# Altium PCB FMC_ADC_100M_10B_16CHA_TDC_PSU.PcbDoc (part 2 of 2)
Units mil, origin at the board's own origin, x right, y up, seen from the top; angles counter-clockwise.
Board outline 748.03 x 2716.54 mil, 6 copper layers (TOP, G1, L2, L3, P4, BOTTOM), stack 50.472 mil thick; 83 components, 50 nets, 259 pads, 166 vias.
Unrouted connection lines stored in the file: 1.
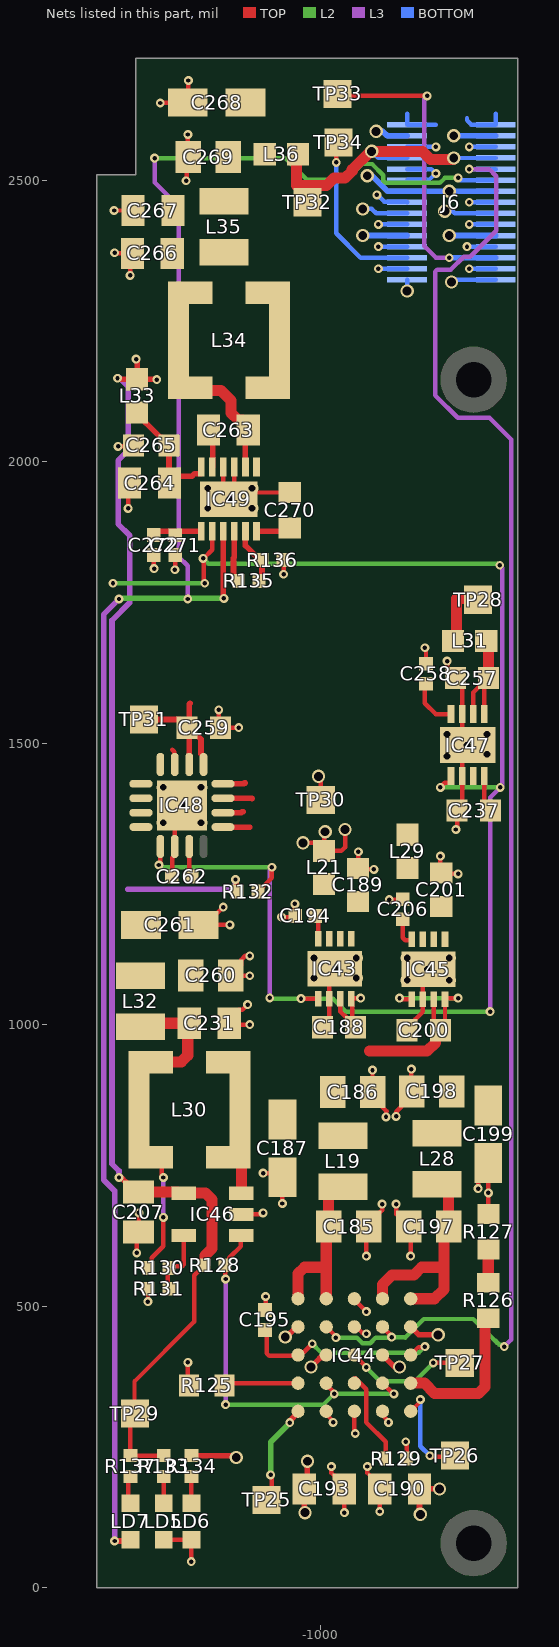
[diagram p6: the nets of this part, all layers, seen from the top]

## Via types
v1: diameter 15.75, hole 7.87, TOP to BOTTOM, tented both sides, 116 vias
v2: diameter 23.62, hole 15.75, TOP to BOTTOM, tented both sides, 25 vias
v3: diameter 23.62, hole 11.81, TOP to BOTTOM, tented both sides, 25 vias

## Nets (pads, with @x,y where several pads share a name; then routed paths per layer and width w, separated by ;. In a path a pad name is that pad's centre, name@x,y a point inside that pad or via, vN(x,y) a via of type N, cw(c..) or ccw(c..) an arc to the next point about the centre after c; other vN are vias at no path point)
GND: C185.1 C186.1 C187.2 C188.1 C189.1 C190.1 C193.1 C194.1 C195.1 C197.1 C198.1 C199.2 C200.1 C201.1 C206.1 C207.1 C231.1 C237.1 C257.1 C258.1 C259.1 C260.1 C261.2 C262.1 C264.1 C265.1 C266.1 C267.1 C268.1 C269.1 C270.1 C271.1 C272.1 IC43.6 IC43.9 IC44.B5 IC44.C1 IC44.C2 IC44.C5 IC44.D5 IC45.6 IC45.9 IC46.2 IC47.3 IC47.6 IC47.9 IC48.6 IC48.17 IC49.9 IC49.10 IC49.13 J6.5 J6.6 J6.10 J6.12 J6.15 J6.16 J6.19 J6.20 J6.23 J6.24 J6.27 J6.28 LD5.1 LD6.1 R125.2 R127.2 R129.1 R131.1 R136.2 | length 3669
  TOP w7.87: v1(-1367,2446) C267.1@-1333.43,2446 ; v1(-1366,2371) -1365,2370 C266.1@-1334.43,2370 -1338.58,2365.85 v1(-1338.58,2330.71) ; v1(-1360,2027) -1334.29,2027 C265.1@-1332.55,2028.74 ; v1(-1342,1917) -1342,1959.23 C264.1@-1339.49,1961.74 ; v1(-1326.77,594.49) -1326.77,628.8 C207.1@-1324,631.57 -1322.83,632.73 v1(-1322.83,665.35) ; v1(-1307.09,507.87) -1306.75,508.21 -1306.75,530.4 R131.1@-1306.41,530.74 ; C272.1@-1296.42,1834.1 -1296.42,1810.42 v1(-1296,1810) ; v1(-1285,2637) -1284.38,2637.62 -1235.56,2637.62 -1235,2638.18 v1(-1235,2677) ; LD5.1@-1283,83 -1281.1,84.9 LD5.1@-1278.88,84.9 LD6.1@-1229.67,84.9 -1229.67,46.33 v1(-1230,46) ; C262.1@-1263.78,1267.72 -1263.78,1296.45 -1259.24,1300.99 IC48.6@-1259.24,1316.37 -1259.24,1353.73 IC48.17@-1259.84,1354.33 ; v1(-1259,1808) -1258.42,1808.58 C271.1@-1258.42,1833.91 ; v1(-1239,2499) -1238.31,2499.69 -1238.31,2538.12 C269.1@-1235.43,2541 -1236,2541.57 v1(-1236,2581) ; v1(-1236,400) -1236,361 R125.2@-1234,359 ; v1(-1181.1,1559.06) -1181.1,1530.17 C259.1@-1178.3,1527.37 -1178.11,1527.56 v1(-1145.67,1527.56) ; v1(-1173.23,1208.66) -1184.22,1197.67 -1196.15,1197.67 C261.2@-1216.82,1177 -1161.58,1177 v1(-1161.42,1177.17) ; IC49.10@-1173.08,1990.46 -1173.08,1956.54 IC49.13@-1169.29,1952.76 ; IC49.9@-1153.39,1990.46 -1153.39,1952.6 IC49.13@-1149.61,1948.82 ; IC49.13@-1150,1945 -1149.82,1945.18 C270.1@-1054.97,1945.18 ; IC46.2@-1140.9,662.75 -1107.1,662.75 -1104.49,665.35 v1(-1102.36,665.35) ; v1(-1129.92,1035.43) -1139.39,1025.97 -1145.67,1025.97 -1162.4,1009.24 C231.1@-1162.4,1002.35 -1160.05,1000 v1(-1125.98,1000) ; v1(-1125.98,1086.61) -1159.1,1086.61 C260.1@-1159.83,1087.35 -1141.13,1106.05 -1141.13,1114.77 -1133.86,1122.05 v1(-1125.98,1122.05) ; v1(-1102.36,736.22) -1075.4,736.22 C187.2@-1068,728.82 v1(-1068,682.16) v1@-1070.87,679.3 ; C195.1@-1099,493 -1098,494 v1(-1098,517) ; v1(-1069.43,1190.76) -1047.43,1190.76 C194.1@-1045.28,1192.91 -1045.8,1193.44 v1(-1045.8,1214.39) ; R136.2@-1067.17,1825.1 -1066,1823.93 v1(-1066,1800) ; C188.1@-992,1003 -984.84,1010.16 IC43.6@-984.84,1046.21 -984.84,1091.16 IC43.9@-983,1093 ; IC44.D5@-990.21,313 -987.2,309.99 -987.2,304.64 -978.01,295.45 v1(-978.01,293.31) ; v1(-981,215) -981,203.44 -976.39,198.83 -975.06,198.83 -958.32,182.09 C193.1@-958.32,175.2 -958.32,133.32 v1(-958,133) ; IC44.C5@-940.21,313 -940.21,277.34 -938.64,275.76 v1(-938.64,273.63) ; IC44.C2@-940.21,463 -936.61,463 -925.92,452.3 -920.46,452.3 v1(-918.95,450.8) ; IC44.C1@-940.21,513 -940.21,511.43 v1(-918.95,490.17) ; v1(-933.07,1307.09) -933.07,1278.46 C189.1@-934,1277.53 -932.06,1275.59 v1(-905.51,1275.59) ; v1(-918.95,588.59) -918.95,637.05 C185.1@-914.97,641.04 -914.97,646.94 -896.27,665.65 -895.61,665.65 -891,670.26 v1(-891,681) ; v1(-917,215) -917,203.44 -912.39,198.83 -912.06,198.83 -895.33,182.09 C190.1@-895.33,175.2 -895,174.87 v1(-895,135) ; C186.1@-907.97,879.97 v1(-908,919) ; C186.1@-907.97,879.97 -896.92,868.92 -896.92,859.92 -883,846 -884,845 v1(-884,836) ; IC44.B5@-890.21,313 -887.2,309.99 -887.2,303.06 -879.58,295.45 v1(-879.58,293.31) ; v1(-878.28,1222.07) -854.7,1222.07 C206.1@-854.33,1222.44 ; v1(-866.14,681.1) -866.14,663.35 C197.1@-843.83,641.04 -840.21,637.42 v1(-840.22,588.59) ; v1(-866,837) -866,843 -865,844 -866,845 -857.1,853.9 -857.1,862.5 C198.1@-838.4,881.2 -839,881.8 v1(-839,921) ; v1(-849,259) -847.5,257.5 R129.1@-847.5,229 ; C200.1@-837,1004 -833.51,1004 -831.76,1005.75 -831.76,1009.24 -818.59,1022.41 IC45.6@-818.59,1044.79 -818.59,1088.59 IC45.9@-820,1090 ; v1(-814.96,1669.29) -814.96,1667.16 -813,1665.2 C258.1@-813,1640.72 ; v1(-787.4,1299.21) -787.4,1270.46 C201.1@-786,1269.06 -784.66,1267.71 v1(-755.9,1267.71) ; v1(-775.59,1645.67) -775.59,1630.19 C257.1@-760.85,1615.45 ; v1(-759.84,1346.46) -757.53,1348.77 C237.1@-757.53,1380 ; C237.1@-758,1387 -757.42,1387 -748.67,1395.75 IC47.6@-748.67,1441.25 -748.67,1477.02 -751.97,1480.31 -751.97,1483.11 IC47.9@-738.83,1496.25 ; C257.1@-755.91,1610.24 -748.67,1603 IC47.3@-748.67,1551.25 -748.67,1522.98 IC47.9@-751.97,1519.68 ; v1(-720.47,708.66) -720.47,763.43 -716.19,767.72 C199.2@-702.42,753.94 ; C199.2@-717,755 -702.42,740.42 v1@-702.42,701 ; R127.2@-702.42,671.27 v1@-702.42,701 ; v1(-702,701) v1@-702.42,701
  BOTTOM w7.87: v1(-900.12,2473.89) -899.1,2473.89 -897.64,2472.44 -886.8,2461.6 -847.43,2461.6 J6.16@-846.46,2460.63 ; v1(-897.64,2342.52) J6.28@-846.46,2342.52 ; v1(-897.64,2381.89) J6.24@-846.46,2381.89 ; v1(-897.64,2421.26) J6.20@-846.46,2421.26 ; J6.12@-846.46,2500 -845.47,2500.98 -806.77,2500.98 -795.94,2511.81 -803.82,2519.69 J6.10@-846.46,2519.69 ; J6.6@-846.46,2559.06 v1(-795.28,2559.06) ; v1(-740.16,2381.89) J6.23@-688.98,2381.89 ; v1(-736.22,2342.52) J6.27@-688.98,2342.52 ; v1(-736.22,2421.26) J6.19@-688.98,2421.26 ; v1(-736.22,2460.63) J6.15@-688.98,2460.63 ; v1(-736.22,2559.06) J6.5@-688.98,2559.06
  other v1: -795.27,2511.81
  other v3: -846.46,1078.74 -771.65,1078.74 -1011.81,1082.68 -937.01,1082.68 -972.44,1098.43 -811.02,1098.43 -1011.81,1118.11 -937.01,1118.11 -846.46,1118.11 -771.65,1118.11 -1279.53,1358.27 -1212.6,1358.27 -1244.09,1389.76 -1279.53,1421.26 -1212.6,1421.26 -775.59,1476.38 -704.72,1480.31 -740.16,1496.06 -775.59,1515.75 -704.72,1515.75 -1200.79,1917.32 -1122.05,1917.32 -1161.42,1933.07 -1200.79,1952.76 -1122.05,1952.76
N3V0: C266.2 C267.2 IC49.7 L34.2 L35.1
N3V0A: J6.7 J6.8 L36.2 TP32.1 | length 511.8
  TOP w19.68: L36.2@-1040.47,2546 -1043.31,2543.17 -1043.31,2490.31 -990.01,2490.31 -976.38,2503.94 -956.69,2503.94 -943.98,2516.65 -943.98,2518.91 -911.71,2551.18 v2(-909.45,2551.18) -819.52,2551.18 -804.68,2536.34 v2@-763.78,2536.34
  BOTTOM w7.87: v2(-909.45,2551.18) -897.64,2539.37 J6.8@-846.46,2539.37 ; v2(-763.78,2539.37) J6.7@-688.98,2539.37
NetC194_2: C194.2 IC43.4 | length 47.9
  TOP w7.87: C194.2@-1011.81,1196.85 -1010.64,1196.85 -1004.52,1190.73 IC43.4@-1004.52,1152.64
NetC195_2: C195.2 IC44.A3 IC44.E3 | length 370.4
  TOP w7.87: C195.2@-1096.12,450.8 -1096.12,416.04 -1091.51,411.43 -1041.79,411.43 IC44.E3@-1040.21,413 ; IC44.E3@-1042,418 -1040.01,416.01 -1032.94,416.01 -1030.95,418 -1030,418 v1(-1015,433) ; IC44.A3@-840.21,413 -826.15,427.06 -815.94,427.06 v1(-815,428)
  L2 w7.87: v1(-1015,433) -999.32,417.32 -825.68,417.32 v1(-815,428)
NetC206_2: C206.2 IC45.4 | length 51.4
  TOP w7.87: C206.2@-854.33,1187.01 -854.33,1154.22 -849.72,1149.61 -839.88,1149.61 IC45.4@-838.28,1151.21
NetC258_2: C258.2 IC47.4 | length 82.3
  TOP w7.87: C258.2@-814.96,1598.43 -814.96,1570.87 -795.35,1551.25 IC47.4@-768.35,1551.25
NetC262_2: C262.2 IC48.7 | length 51.9
  TOP w7.87: IC48.7@-1233.65,1316.37 -1233.65,1271.27 -1230.1,1267.72 C262.2@-1228.35,1267.72
NetC263_1: C263.1 IC49.11 | length 63.9
  TOP w10: IC49.11@-1192.76,1990.46 -1192,1991.22 C263.1@-1192,2054
NetC263_2: C263.2 IC49.8 L34.1 | length 218
  TOP w10: C263.2@-1134,2051 -1133.71,2050.71 IC49.8@-1133.71,1990.46
  TOP w19.68: L34.1@-1240.16,2125.98 -1177.17,2125.98 -1159.5,2108.31 -1159.5,2086.61 -1146.34,2073.46 -1139.45,2073.46 -1128.62,2062.63 C263.2@-1128.62,2055.74
NetC264_2: C264.2 C265.2 IC49.12 L33.1 | length 208.6
  TOP w10: L33.1@-1326.06,2087.21 -1311.37,2072.53 -1311.37,2069.37 -1285.43,2043.43 -1283.26,2043.43 -1272,2032.17 C265.2@-1272,2028 ; C265.2@-1269.56,2028.74 -1269.56,1970.56 C264.2@-1269,1970 ; C264.2@-1266,1974 -1228.9,1974 -1224.18,1978.72 -1213.35,1978.72 -1212.45,1979.63 IC49.12@-1212.45,1990.46
NetC268_2: C268.2 C269.2 L35.2 L36.1
NetC270_2: C270.2 IC49.6 | length 55.6
  TOP w10: IC49.6@-1114.02,1876.28 -1060.28,1876.28 C270.2@-1059,1875
NetC271_2: C271.2 C272.2 IC49.1 | length 82.8
  TOP w10: C272.2@-1291,1871 -1291,1874.49 -1289.21,1876.28 -1258.42,1876.28 IC49.1@-1212.45,1876.28
NetIC44_A4: IC44.A4 R126.1 | length 267.4
  TOP w19.68: IC44.A4@-840.21,363 -816,363 -798,345 -719.53,345 -708,356.53 -708,470.48 -705.48,473 R126.1@-700,473
NetIC44_A5: IC44.A5 TP26.1 | length 181
  TOP w7.87: IC44.A5@-840.21,313 -824.51,328.71 -824.51,332.49 v1(-823,334) ; v1(-806,234) -804.49,232.49 -798.93,232.49 -798.43,232 TP26.1@-761,232
  BOTTOM w7.87: v1(-823,334) -823,251 v1(-806,234)
NetIC44_C3: IC44.C3 TP27.1 | length 217
  TOP w7.87: IC44.C3@-940.21,413 -921.18,393.97 v1@-921.03,393.97 ; v1(-800,399) TP27.1@-753,399
  L2 w7.87: v1(-919,391) -894.14,366.14 -832.86,366.14 v1(-800,399)
NetIC44_C4: IC44.C4 R129.2 | length 165.5
  TOP w7.87: IC44.C4@-938.64,372.06 -918.95,352.37 -918.95,293.31 -884.5,258.87 R129.2@-884.5,229
NetIC44_E4: IC44.E4 R125.1 | length 144.9
  TOP w7.87: R125.1@-1168.95,363 IC44.E4@-1040.21,363 ; R125.1@-1167.28,357.63 -1167.28,359.58 R125.1@-1157.23,369.63
NetIC44_E5: IC44.E5 TP25.1 | length 176.9
  TOP w7.87: TP25.1@-1096.12,155.52 -1087,164.64 -1087,195.87 -1087.49,196.36 -1087.49,197.51 v1@-1087,198
  TOP w10: v1@-1055,296 -1040.21,310.79 IC44.E5@-1040.21,313
  L2 w10: v1(-1089,200) -1089,258 -1055,292 v1(-1055,293)
NetIC46_3: IC46.3 L30.1 | length 75.1
  TOP w19.68: L30.1@-1149.61,771.65 -1140.9,762.95 IC46.3@-1140.9,700.15
NetIC46_5: IC46.5 R130.1 R131.2 | length 114.4
  TOP w7.87: R131.2@-1271.65,531.5 -1271.65,565.49 R130.1@-1269.4,567.74 ; R130.1@-1267.72,570.87 -1246.17,570.87 -1243.27,573.77 IC46.5@-1243.27,625.35
NetIC49_4: IC49.4 R135.1 | length 91
  TOP w10: IC49.4@-1153.39,1876.28 -1153.39,1829.99 -1155,1828.38 -1155,1797.28 -1150,1792.28 R135.1@-1150,1788
NetIC49_5: IC49.5 R135.2 R136.1 | length 102.5
  TOP w10: IC49.5@-1133.71,1876.28 -1133.71,1850.71 -1115.31,1832.31 -1110.6,1832.31 -1109,1830.71 R136.1@-1109,1826 ; R135.2@-1107,1787 -1104.18,1789.82 R136.1@-1104.18,1825.1
NetJ6_25: J6.25 TP33.1 | length 564.7
  TOP w7.87: TP33.1@-970,2653 -966.61,2649.61 v1(-811.02,2649.61)
  L3 w7.87: v1(-811.02,2649.61) -816.02,2644.61 -816.02,2382.95 -795.28,2362.2 v1(-771.65,2362.2)
  BOTTOM w10: v1(-771.65,2362.2) J6.25@-688.98,2362.2
NetJ6_26: J6.26 TP34.1 | length 307
  TOP w7.87: v1(-972.44,2531.5) -972.44,2562.99 TP34.1@-968.5,2566.93
  BOTTOM w7.87: v1(-972.44,2531.5) -972.44,2405.51 -929.13,2362.2 J6.26@-846.46,2362.2
NetLD5_2: LD5.2 R133.1 | length 45.2
  TOP w7.87: R133.1@-1279,195 -1278.88,194.88 LD5.2@-1278.88,149.86
NetLD6_2: LD6.2 R134.1 | length 43.4
  TOP w7.87: LD6.2@-1230,154 -1229.67,154.33 R134.1@-1229.67,197.3
NetLD7_2: LD7.2 R137.1 | length 47.8
  TOP w7.87: R137.1@-1342,196 -1342,153.92 LD7.2@-1337.94,149.86
NetR126_2: R126.2 R127.1 | length 66.9
  TOP w19.68: R127.1@-702.42,608.28 -702.42,543.42 R126.2@-701,542
P1V8: C259.2 IC48.9 IC48.10 IC48.11 IC48.12 IC48.13 IC48.14 J6.17 J6.18 TP31.1 | length 603.7
  TOP w10: TP31.1@-1314,1542 -1251.06,1542 -1244.09,1535.04 C259.2@-1244.09,1531.5 ; IC48.14@-1233.65,1462.04 -1233.65,1569.5 -1232.28,1570.87 ; C259.2@-1224.41,1519.68 -1224.41,1513.44 -1223.66,1512.69 -1218.46,1512.69 -1212.6,1506.83 -1212.6,1481.38 -1208.06,1476.84 IC48.13@-1208.06,1462.04 ; IC48.9@-1173.61,1350.82 -1126.41,1350.82 -1125.98,1350.39 ; IC48.10@-1173.61,1376.41 -1140.89,1376.41 -1139.35,1377.95 -1137.8,1377.95 ; IC48.11@-1173.61,1402 -1122.47,1402 -1122.05,1401.57 ; IC48.12@-1173.61,1427.59 -1136.96,1427.59 -1135.41,1429.13 -1133.86,1429.13
  BOTTOM w7.87: v2(-925.2,2448.82) -909.45,2448.82 -901.57,2440.94 J6.18@-846.46,2440.94 ; v2(-779.53,2444.88) -765.59,2444.88 -761.65,2440.94 J6.17@-688.98,2440.94
P2V0: C260.2 C261.1 IC48.1 IC48.2 IC48.3 IC48.4 IC48.15 IC48.16 L32.2 | length 28
  TOP w7.87: -1263.78,1488.19 -1260.37,1484.78 -1260.37,1463.17 IC48.15@-1259.24,1462.04
P2V0_N: C231.2 L30.2 L32.1 R130.2 | length 399.4
  TOP w7.87: R130.2@-1306.41,567.74 -1299.96,574.19 -1299.96,585.87 -1279.53,606.3 v1(-1279.53,657.48) ; L30.2@-1287.4,767.72 -1282.43,762.75 v1@-1282.43,733.38
  TOP w19.68: L32.1@-1320.27,996.28 L32.1@-1311.02,987.04 ; L32.1@-1295.28,992.13 -1295.28,993.87 -1286.8,1002.35 C231.2@-1233.27,1002.35 -1236.22,999.39 -1236.22,944.88 -1247.75,933.35 -1282.83,933.35 L30.2@-1283.46,932.73
  L3 w7.87: v1(-1279.53,657.48) v1(-1279.53,728.35)
P3V3: C207.2 IC46.4 J6.21 J6.22 L33.2 R128.1 R132.1 R133.2 R137.2 TP29.1 | length 2678.9
  TOP w7.87: TP29.1@-1334.65,311.02 -1337.94,307.73 R137.2@-1337.94,234.31 R133.2@-1278.88,234.31 ; TP29.1@-1330.71,318.9 -1330.71,366.14 -1224.41,472.44 -1224.41,554.71 -1215.04,564.08 -1214.25,564.08 -1206.77,571.56 R128.1@-1206.77,572.35
  TOP w10: v1(-1361,2148) -1359.44,2148 -1357.71,2146.27 L33.2@-1326.06,2146.27 ; v1(-1358.27,728.35) -1354.33,728.35 -1346.56,720.57 -1346.56,718.1 -1337.12,708.66 C207.2@-1334.65,708.66 ; v1(-1328,2182) -1328,2180.44 -1326.06,2178.5 L33.2@-1326.06,2146.27 ; v1(-1291.34,2145.67) -1291.94,2146.27 L33.2@-1326.06,2146.27 ; v1(-1151.38,1257.69) -1150.28,1256.59 -1150.28,1238.86 R132.1@-1148.43,1237.01
  TOP w19.68: C207.2@-1324,702.43 -1255.39,702.43 IC46.4@-1253.75,700.79 ; IC46.4@-1240.16,700.79 -1204.72,700.79 -1192.91,688.98 -1192.91,602.36 -1205.19,590.08 -1205.19,573.92 R128.1@-1206.77,572.35
  L3 w10: v1(-1358.27,728.35) -1358.27,740.16 -1370.67,752.56 -1370.67,1717.88 -1339.13,1749.42 -1339.13,1868.68 -1359.87,1889.42 -1359.87,2001.85 -1342.13,2019.6 -1342.13,2133.46 v1@-1358.27,2149.61 ; -1342.52,1240.16 -1157.24,1240.16 -1151.38,1246.02 v1(-1151.38,1257.69)
  BOTTOM w10: v2(-925.2,2401.57) J6.22@-846.46,2401.57 ; v2(-771.65,2401.57) J6.21@-688.98,2401.57
P3V3_A_N: C201.2 IC45.1 IC45.2 IC45.3 L29.1
P3V3_CLK: J6.1 J6.2 L21.2 TP30.1 | length 353.3
  TOP w7.87: v2(-1031.5,1322.83) -1031.5,1314.96 -1023.62,1322.83 -1008.31,1322.83 L21.2@-994,1308.53 ; v2(-1003.94,1440.94) -1003.94,1438.81 -1000,1434.88 TP30.1@-1000,1399 ; v2(-992.13,1342.52) -992.13,1340.39 -993.67,1338.85 -993.67,1308.86 L21.2@-994,1308.53 ; v2(-956.69,1346.46) -956.69,1314.96 -963.13,1308.53 L21.2@-994,1308.53
  BOTTOM w7.87: -846.46,2618.11 J6.2@-846.46,2598.43 -795.28,2598.43 ; -740.16,2610.24 -740.16,2606.3 -732.28,2598.43 J6.1@-688.98,2598.43 -688.98,2618.11
P3V3_CLK_N: C189.2 IC43.1 IC43.2 IC43.3 L21.1
P3V3A: J6.29 J6.30 L29.2 | length 102.4
  BOTTOM w7.87: v2(-846.46,2303.15) J6.30@-846.46,2322.83 ; v2(-767.72,2318.89) -767.72,2322.83 J6.29@-688.98,2322.83
P3V7: C186.2 C187.1 C188.2 C200.2 IC43.7 IC43.8 IC45.5 IC45.7 IC45.8 L19.2 | length 492.5
  TOP w7.87: IC43.7@-965.15,1046.21 -965.15,1023.15 -953,1011 -952.76,1011 -952,1010.24 C188.2@-952,1010 ; C188.2@-944,1004 -944,1044.75 IC43.8@-945.47,1046.21 -944.68,1047 v1(-929,1047) ; v1(-860,1047) -857.87,1047 -855.66,1044.79 IC45.5@-838.28,1044.79 ; IC45.7@-798.91,1044.79 -798.91,1002.91 C200.2@-798,1002 ; C200.2@-781,997 -779.22,998.78 IC45.8@-779.22,1044.79 ; IC45.8@-779,1046 -778,1047 v1(-756,1047)
  TOP w19.68: -913.39,952.76 -811.02,952.76 -796.33,967.45 -796.33,981.14 C200.2@-787.47,990
  L2 w7.87: v1(-860,1047) v1(-756,1047)
P3V7_N: C185.2 IC44.D1 IC44.E1 L19.1 | length 297.2
  TOP w19.68: IC44.E1@-1040.21,513 -1040.21,557.37 -1028.68,568.91 -997.69,568.91 ; IC44.D1@-990.21,513 -990.21,622.34 C185.2@-984.59,627.96 ; C185.2@-985.83,641.04 -985.83,698.24 -977.38,706.7 L19.1@-958.32,706.7
P5V0A: J6.13 J6.14 L31.2 TP28.1 | length 354.2
  TOP w19.68: L31.2@-764.95,1681.51 -759.03,1687.43 -759.03,1757.01 -738.77,1757.01 -728.35,1746.59 TP28.1@-728.35,1748.03
  BOTTOM w10: v2(-917.32,2507.87) -908.83,2507.87 -881.27,2480.31 J6.14@-846.46,2480.31 v2(-771.65,2480.31) ; v2(-771.65,2480.31) -745.38,2480.31 ; -745.38,2480.31 J6.13@-688.98,2480.31
P5V0A_N: C257.2 IC47.1 IC47.2 L31.1 | length 181.5
  TOP w7.87: IC47.2@-728.98,1551.25 -728.98,1589.91 -719.19,1599.7 C257.2@-716.56,1599.7 ; C257.2@-716.54,1599.73 C257.2@-716.54,1602.36 ; IC47.1@-709.3,1551.25 C257.2@-709.3,1609.6
  TOP w19.68: L31.1@-708.66,1677.17 -707.29,1677.17 -701.79,1671.67 C257.2@-701.79,1615.45
P5V5: C198.2 C199.1 C237.2 IC47.8 L28.2 | length 64.8
  TOP w7.87: IC47.8@-709.3,1441.25 -709.3,1395.3 C237.2@-696,1382
P5V5_N: C197.2 IC44.A1 IC44.B1 L28.1 | length 396.2
  TOP w19.68: IC44.B1@-890.21,513 -890.21,538.59 -873.69,555.12 -834.32,555.12 -820.53,568.91 -781.16,568.91 ; IC44.A1@-840.21,513 -797.69,513 -781.16,529.54 -781.16,568.91 ; C197.2@-781.16,641.04 -781.16,568.91 ; L28.1@-781.16,706.7 -776.84,706.7 -772.97,702.83 C197.2@-772.97,641.04
P12V0: C190.2 C193.2 IC44.A2 IC44.B3 IC44.D3 IC44.E2 J6.3 J6.4 R134.2 | length 552.3
  TOP w10: R134.2@-1229.67,234.31 -1153.31,234.31 v2(-1150,231) ; v2(-1062.99,444.88) -1061.11,444.88 -1042.99,463 IC44.E2@-1040.21,463 ; v2(-1028,133) -1028,134.56 -1029.19,135.74 C193.2@-1029.19,175.2 -1027.98,174 -1023.62,178.36 v2(-1023.62,224.41) ; v2(-1017.38,391.74) -1001.2,407.91 -998.98,407.91 -993.9,413 IC44.D3@-990.21,413 ; IC44.B3@-890.21,413 -870.05,392.84 -861,392.84 v2(-859.9,391.74) ; IC44.A2@-840.21,463 -839.75,463 -825.57,448.82 v2(-791.34,448.82) ; v2(-823,130) -824.46,131.46 C190.2@-824.46,175.2 -789.2,175.2 v2(-789,175)
  BOTTOM w10: v2(-901.57,2586.61) -889.76,2586.61 -881.89,2578.74 J6.4@-846.46,2578.74 ; v2(-763.78,2578.74) J6.3@-688.98,2578.74
PG_1V8: IC43.5 IC47.5 IC48.5 IC49.2 R132.2 | length 2689
  TOP w7.87: v1@-1284.83,1286.04 IC48.5@-1284.83,1316.37 ; v1(-1206,1784) -1207.51,1785.51 -1207.51,1791.07 -1208,1791.57 -1208,1828 -1192.76,1843.24 IC49.2@-1192.76,1865.46 ; IC49.2@-1194.73,1863.49 IC49.2@-1192.76,1865.46 ; IC49.2@-1192.76,1876.28 IC49.2@-1192.76,1865.46 ; R132.2@-1111.42,1236.22 -1111.42,1237.01 -1103.94,1244.49 -1103.15,1244.49 -1086.61,1261.02 v1@-1086.61,1275.59 ; v1(-1035,1046) -1034.79,1046.21 IC43.5@-1004.52,1046.21 ; v1@-787,1422.61 -779.83,1429.78 -770.42,1429.78 -768.35,1431.84 IC47.5@-768.35,1441.25
  L3 w7.87: v1(-1090.55,1047.24) v1@-1090.55,1275.59 ; v1@-1089.49,1274.53 -1086.61,1277.4 v1(-1086.61,1279.53) ; v1(-699,1023) -699,1403.36 -677.17,1425.2 -677.17,1811.17 v1(-682,1816)
  L2 w7.87: v1(-1369,1784) v1(-1206,1784) ; v1(-1287.4,1283.46) -1283.46,1279.53 v1(-1086.61,1279.53) ; v1(-1209,1828) -1199.9,1818.9 -684.9,1818.9 v1(-682,1816) ; v1(-1090.55,1047.24) -1089.31,1046 v1(-1035,1046) -978,1046 -955,1023 v1(-699,1023) ; v1(-787.4,1421.26) v1(-681.1,1421.26)
PG_3V7_5V5: IC44.B4 IC44.D4 IC46.1 R128.2 | length 667.2
  TOP w7.87: R128.2@-1169.76,572.35 -1169.38,571.96 -1169.38,548.38 v1(-1169,548) ; R128.2@-1169.76,577 -1165.9,577 -1162.28,580.61 -1162.28,585.72 -1141.66,606.34 -1141.66,624.59 IC46.1@-1140.9,625.35 ; IC44.D4@-990.21,363 -990.21,360.79 -977.51,348.08 -977.51,345.51 v1(-976,344) ; IC44.B4@-890.21,363 -871.21,344 v1(-870,344)
  L3 w7.87: v1(-1169,325) v1(-1169,548)
  L2 w7.87: v1(-1169,325) -995,325 v1@-978,342 ; v1(-976,344) v1(-870,344)
PGOOD_VADJ: IC49.3 J6.11 LD7.1 | length 3493.7
  TOP w10: v1(-1366.14,82.68) -1340.16,82.68 LD7.1@-1337.94,84.9 ; IC49.3@-1173.08,1876.28 -1173.08,1758.08 v1(-1172,1757)
  L3 w7.87: v1(-1295,2539) -1295,2495.79 -1251.97,2452.76 -1251.97,1830.71 -1236.22,1814.96 v1(-1236.22,1755.91)
  L3 w10: v1(-1366.14,82.68) -1366.14,704.72 -1385.67,724.25 -1385.67,1728.5 v1(-1358.27,1755.91)
  L2 w7.87: v1(-1295,2539) -1062.59,2539 -1024.66,2501.06 -953.48,2501.06 -925.92,2528.62 -908.73,2528.62 -888.7,2508.59 -888.7,2499.09 -884.61,2494.99 -788.31,2494.99 -779.37,2503.94 v1(-755.91,2503.94)
  L2 w10: v1(-1358.27,1755.91) -1357.17,1757 v1(-1172,1757)
  BOTTOM w7.87: v1(-755.91,2503.94) -751.97,2500 J6.11@-688.98,2500
Power_Good: IC47.7
TEMP_ALARM: IC44.B2 IC44.D2 J6.9 | length 2732
  TOP w7.87: IC44.D2@-990.21,463 -973,445.79 v1(-973,444) ; IC44.B2@-890.21,463 -890.21,462.79 v1@-875.51,448.08
  L3 w7.87: v1(-736.22,2519.68) -700.68,2519.68 -688,2507 -688,2410.27 -734.14,2364.13 -745.95,2364.13 -769.03,2341.06 -792.8,2341.06 -796.34,2337.52 -796.34,2117.51 -756.51,2077.68 -700.18,2077.68 -661.65,2039.14 -661.54,2039.24 -661.54,440.46 v1(-674,428)
  L2 w7.87: v1(-973,444) -935.93,444 -925.92,433.98 -911.99,433.98 -901.97,444 -874.89,444 v1(-874.01,444.88) -850.88,444.88 -850,444 -817,477 -729,477 -687,435 ; -689,438 -682.55,431.55 -679.68,431.55 -676.13,428 v1(-674,428)
  BOTTOM w7.87: v1(-736.22,2519.68) J6.9@-688.98,2519.68
pads on no net: B1.1 B2.1 IC48.8

## Polygon pours and split planes (outlines as drawn)
NetC264_2 on TOP "NONET_L-01_P-001" (solid, remove dead copper, pour order 36): -1370.08,2118.11 -1295.28,2118.11 -1192.91,2015.75 -1192.91,1952.76 -1228.35,1917.32 -1295.28,1917.32 -1303.15,1925.2 -1303.15,2023.62 -1330.71,2051.18 -1358.27,2051.18 -1370.08,2062.99
P5V0A on TOP "NONET_L-01_P-001" (solid, remove dead copper, pour order 8): -925.2,2543.31 -665.35,2543.31 -665.35,1716.54 -795.28,1716.54 -842.52,1763.78 -842.52,2196.85 -724.41,2314.96 -724.41,2413.39 -779.53,2468.5 -925.2,2468.5
P1V8 on TOP "NONET_L-01_P-001" (solid, remove dead copper, pour order 20): -795.28,2464.57 -791.34,2460.63 -775.59,2460.63 -759.84,2444.88 -759.84,2429.13 -838.58,2350.39 -940.94,2350.39 -940.94,1551.18 -1078.74,1413.39 -1078.74,1338.58 -1102.36,1314.96 -1137.8,1314.96 -1157.48,1334.65 -1157.48,1405.51 -1200.79,1448.82 -1236.22,1448.82 -1248.03,1460.63 -1248.03,1598.43 -996.06,1850.39 -996.06,2456.69 -988.19,2464.57
P5V5_N on TOP "NONET_L-01_P-001" (solid, remove dead copper, pour order 34): -858.27,755.91 -740.16,755.91 -736.22,751.97 -736.22,523.62 -779.53,480.31 -897.64,480.31 -917.32,500 -917.32,551.18 -889.76,578.74 -834.65,578.74 -811.02,602.36 -811.02,677.17 -814.96,681.1 -854.33,681.1 -858.27,685.04
P5V5 on TOP "TOP-P5V5" (solid, remove dead copper, pour order 18): -854.33,771.65 -842.52,759.84 -716.54,759.84 -657.48,818.9 -657.48,933.07 -657.48,1393.7 -681.1,1417.32 -720.47,1417.32 -732.28,1405.51 -732.28,937.01 -795.28,937.01 -803.15,929.13 -803.15,850.39 -834.65,850.39 -854.33,830.71
P3V7_N on TOP "NONET_L-01_P-001" (solid, remove dead copper, pour order 32): -905.51,748.03 -897.64,740.16 -897.64,685.04 -909.45,673.23 -940.94,673.23 -944.88,669.29 -944.88,500 -964.57,480.31 -1066.93,480.31 -1082.68,496.06 -1082.68,645.67 -1031.5,696.85 -1031.5,744.09 -1027.56,748.03
NetC268_2 on TOP "NONET_L-01_P-001" (solid, remove dead copper, pour order 4): -1240.16,2421.26 -1102.36,2421.26 -1102.36,2500 -1043.31,2500 -1043.31,2677.17 -1181.1,2677.17 -1181.1,2598.43 -1200.79,2598.43 -1200.79,2519.68 -1240.16,2519.68
P3V3A on TOP "NONET_L-01_P-001" (solid, remove dead copper, pour order 22): -929.13,2338.58 -751.97,2338.58 -751.97,2295.28 -854.33,2192.91 -854.33,1763.78 -830.71,1740.16 -830.71,1405.51 -799.21,1374.02 -799.21,1322.83 -803.15,1318.9 -897.64,1318.9 -929.13,1350.39
P3V3_CLK_N on TOP "NONET_L-01_P-001" (solid, remove dead copper, pour order 28): -1035.43,1283.46 -952.76,1283.46 -952.76,1248.03 -893.7,1248.03 -893.7,1149.61 -909.45,1133.86 -988.19,1133.86 -992.13,1137.8 -992.13,1204.72 -1035.43,1204.72
P3V3_A_N on TOP "NONET_L-01_P-001" (solid, remove dead copper, pour order 26): -885.83,1311.02 -811.02,1311.02 -811.02,1251.97 -803.15,1244.09 -751.97,1244.09 -744.09,1236.22 -744.09,1137.8 -751.97,1129.92 -826.77,1129.92 -834.65,1137.8 -834.65,1240.16 -881.89,1240.16 -885.83,1244.09
P3V7 on TOP "NONET_L-01_P-001" (solid, remove dead copper, pour order 12): -972.44,1062.99 -901.57,1062.99 -901.57,948.82 -940.94,909.45 -940.94,846.46 -937.01,842.52 -909.45,842.52 -897.64,830.71 -897.64,763.78 -905.51,755.91 -1000,755.91 -1023.62,779.53 -1102.36,779.53 -1118.11,795.28 -1118.11,905.51 -1062.99,960.63 -988.19,960.63 -972.44,976.38
P2V0 on TOP "NONET_L-01_P-001" (solid, remove dead copper, pour order 10): -1374.02,1500 -1240.16,1500 -1240.16,1133.86 -1196.85,1133.86 -1196.85,1043.31 -1200.79,1047.24 -1374.02,1047.24
N3V0 on TOP "NONET_L-01_P-001" (solid, remove dead copper, pour order 6): -1299.21,2500 -1299.21,2322.83 -1141.73,2322.83 -1141.73,2086.61 -1102.36,2086.61 -1102.36,2027.56 -1141.73,2027.56 -1141.73,1968.5 -1003.94,1968.5 -1003.94,2421.26 -1240.16,2421.26 -1240.16,2500
GND on BOTTOM "NONET_L-01_P-001" (hatched 90Degree grid 50 track 8, remove dead copper, pour order 40): -1318.9,2700.79 -712.6,2700.79 -673.23,2661.42 -673.23,55.12 -708.66,19.68 -728.35,19.68 -1303.15,19.68 -1390.75,19.68 -1390.75,2502.95 -1318.9,2500
P3V3_CLK on BOTTOM "NONET_L-01_P-001" (solid, remove dead copper, pour order 30): -1051.18,1303.15 -968.5,1303.15 -933.07,1338.58 -933.07,2314.96 -992.13,2374.02 -992.13,2570.87 -964.57,2598.43 -905.51,2598.43 -889.76,2582.68 -649.61,2582.68 -649.61,2649.61 -992.13,2649.61 -1051.18,2590.55
GND on L2 "NONET_L-01_P-001" (solid, remove dead copper, pour order 38): -1318.9,2704.72 -669.29,2704.72 -661.42,2696.85 -661.42,15.75 -669.29,7.87 -1381.89,7.87 -1389.76,15.75 -1389.76,2496.06 -1385.83,2500 -1326.77,2500 -1318.9,2507.87
GND on L3 "NONET_L-01_P-001" (hatched 90Degree grid 50 track 8, remove dead copper, pour order 42): -1315.94,2698.99 -711.61,2698.99 -672.24,2659.62 -672.24,53.32 -707.68,17.89 -715.55,25.76 -1298.23,25.76 -1384.84,25.76 -1357.28,580.88 -1384.84,2497.05 -1315.94,2497.05
GND on G1 (split plane): -669.7,20.1 -1377.54,20.1 -1377.54,2450.79 -1377.54,2489.75 -1328.74,2489.75 -1324.82,2490.13 -1321.05,2491.28 -1317.57,2493.13 -1314.53,2495.63 -1312.03,2498.68 -1310.17,2502.15 -1309.03,2505.92 -1308.64,2509.84 -1308.64,2696.44 -669.7,2696.44
P3V3 on P4 (split plane): -741.32,2411.27 -741.32,2387.94 -758.02,2371.24 -795.28,2371.24 -797.23,2370.85 -798.88,2369.75 -821.01,2347.62 -944.88,2347.62 -946.83,2347.23 -948.49,2346.12 -1045.42,2249.19 -1216.54,2249.19 -1218.49,2248.8 -1220.14,2247.7 -1271.32,2196.52 -1272.43,2194.86 -1272.81,2192.91 -1272.81,2135.97 -1297.39,2111.4 -1375.84,2111.4 -1377.54,2113.1 -1377.54,2253.04 -1304.97,2325.61 -1102.36,2325.61 -1100.41,2326 -1098.76,2327.1 -986.08,2439.78 -769.83,2439.78
P12V0 on P4 (split plane): -669.7,20.1 -1175.9,20.1 -1175.9,423.19 -1131.19,467.9 -1016.65,467.9 -1016.39,467.73 -1014.44,467.34 -913.39,467.34 -911.43,467.73 -909.78,468.84 -824,554.62 -823.17,555.17 -822.06,556.83 -821.67,558.78 -821.67,1856.47 -821.29,1857.05 -820.9,1859 -820.9,2184.89 -703.9,2301.89 -702.79,2303.55 -702.4,2305.5 -702.4,2530.34 -702.79,2532.29 -703.9,2533.94 -720.8,2550.85 -722.46,2551.95 -724.41,2552.34 -895.53,2552.34 -924.04,2580.85 -924.04,2696.44 -669.7,2696.44
GND on P4 (split plane): -934.23,2578.74 -933.84,2576.79 -932.74,2575.14 -901.24,2543.64 -899.59,2542.53 -897.64,2542.15 -726.52,2542.15 -712.6,2528.22 -712.6,2307.61 -829.6,2190.6 -830.71,2188.95 -831.1,2187 -831.1,1860.75 -831.48,1860.18 -831.87,1858.23 -831.87,561.17 -915.5,477.54 -1012.79,477.54 -1013.05,477.71 -1015,478.1 -1133.3,478.1 -1135.25,477.71 -1136.9,476.6 -1184.6,428.9 -1185.71,427.25 -1186.1,425.3 -1186.1,20.1 -1377.54,20.1 -1377.54,2101.2 -1295.28,2101.2 -1293.32,2101.59 -1291.67,2102.69 -1264.11,2130.25 -1263.01,2131.91 -1262.62,2133.86 -1262.62,2190.8 -1214.42,2239 -1043.31,2239 -1041.36,2239.38 -1039.7,2240.49 -942.77,2337.42 -818.9,2337.42 -816.95,2337.81 -815.29,2338.91 -793.16,2361.04 -755.91,2361.04 -753.95,2361.43 -752.3,2362.54 -732.62,2382.22 -731.51,2383.88 -731.12,2385.83 -731.12,2413.39 -731.51,2415.34 -732.62,2416.99 -764.11,2448.49 -765.77,2449.59 -767.72,2449.98 -988.19,2449.98 -990.14,2449.59 -991.79,2448.49 -1104.47,2335.81 -1307.09,2335.81 -1309.04,2335.42 -1310.69,2334.31 -1377.54,2267.46 -1377.54,2450.79 -1377.54,2489.75 -1328.74,2489.75 -1324.82,2490.13 -1321.05,2491.28 -1317.57,2493.13 -1314.53,2495.63 -1312.03,2498.68 -1310.17,2502.15 -1309.03,2505.92 -1308.64,2509.84 -1308.64,2696.44 -934.23,2696.44

## Keep-outs
Keep-Out Layer:
  lines w3.94: -1397.64,0 -1397.64,2519.68 -1318.9,2519.68 -1318.9,2716.54 -649.61,2716.54 -649.61,0 -1397.64,0

## Other copper
TOP:
  rectangle net N3V0: -1141.73,2137.8 -1078.74,2299.21
P4 (plane layer: these items are gaps in the copper):
  lines w10: -1183,-4 -1181,-2 -1181,425.3 -1133.3,473 -1015,473 -1014.44,472.44 -913.39,472.44 -826.91,558.92 -826.77,558.78 -826.77,1858.23 -826,1859 -826,2187 -707.5,2305.5 -707.5,2530.34 -724.41,2547.24 -897.64,2547.24 -929.13,2578.74 -929.13,2708.87 -923,2715 ; -1389.76,2118.11 -1389.76,2248.03 -1307.09,2330.71 -1102.36,2330.71 -988.19,2444.88 -767.72,2444.88 -736.22,2413.39 -736.22,2385.83 -755.91,2366.14 -795.28,2366.14 -818.9,2342.52 -944.88,2342.52 -1043.31,2244.09 -1216.54,2244.09 -1267.72,2192.91 -1267.72,2133.86 -1295.28,2106.3 -1377.95,2106.3 -1389.76,2118.11

## Silkscreen, mask and mechanical layers (free items; w line width, h text height)
TopOverlay:
  lines w5: -1385.83,1232.28 -1385.83,1047.24 -1370.08,1031.5
  lines w10: -787.4,2460.63 -748.03,2460.63 ; -767.72,2440.94 -767.72,2480.31
  text "N3V0A" at -1086.61,2374.02 h30
  text "P5V0" at -826.77,1799.21 h30
  text "FMC_ADC_100M_16B / 16CHA_TDC_PSU v1" at -1314.96,1606.3 h30
  text "P1V8" at -1346.46,1586.61 h30 r90
  text "P3V3_CLK" at -1129.92,1452.76 h30
  text "PG" at -1405.51,0 h30
  text "12V" at -1161.42,0 h30 r90
  text "3V3" at -1322.83,-3.94 h30
TopSolder:
  lines w10: -1646.66,-2735.99 -846.66,-2735.99
Mechanical 1:
  lines w4: -645.67,0 -1397.64,0 -1397.64,2519.68 -1338.58,2519.68 -1338.58,2716.54 -645.67,2716.54
  lines w5: -645.67,2716.54 -645.67,0 ; -645.67,0 -645.67,0

## Text inside footprints (layer, text, board x,y; h text height)
IC44: Mechanical 14 "E" at -1045.21,563 h15.75 r270; Mechanical 14 "D" at -995.21,563 h15.75 r270; Mechanical 14 "C" at -945.21,563 h15.75 r270; Mechanical 14 "B" at -895.21,563 h15.75 r270; Mechanical 14 "A" at -845.21,563 h15.75 r270; Mechanical 14 "1" at -799.9,518 h15.75 r270; Mechanical 14 "2" at -799.9,468 h15.75 r270; Mechanical 14 "3" at -799.9,418 h15.75 r270; Mechanical 14 "4" at -799.9,368 h15.75 r270; Mechanical 14 "5" at -799.9,318 h15.75 r270